# EAGLE board h-bridge_0.7 (EAGLE 8.0.0)
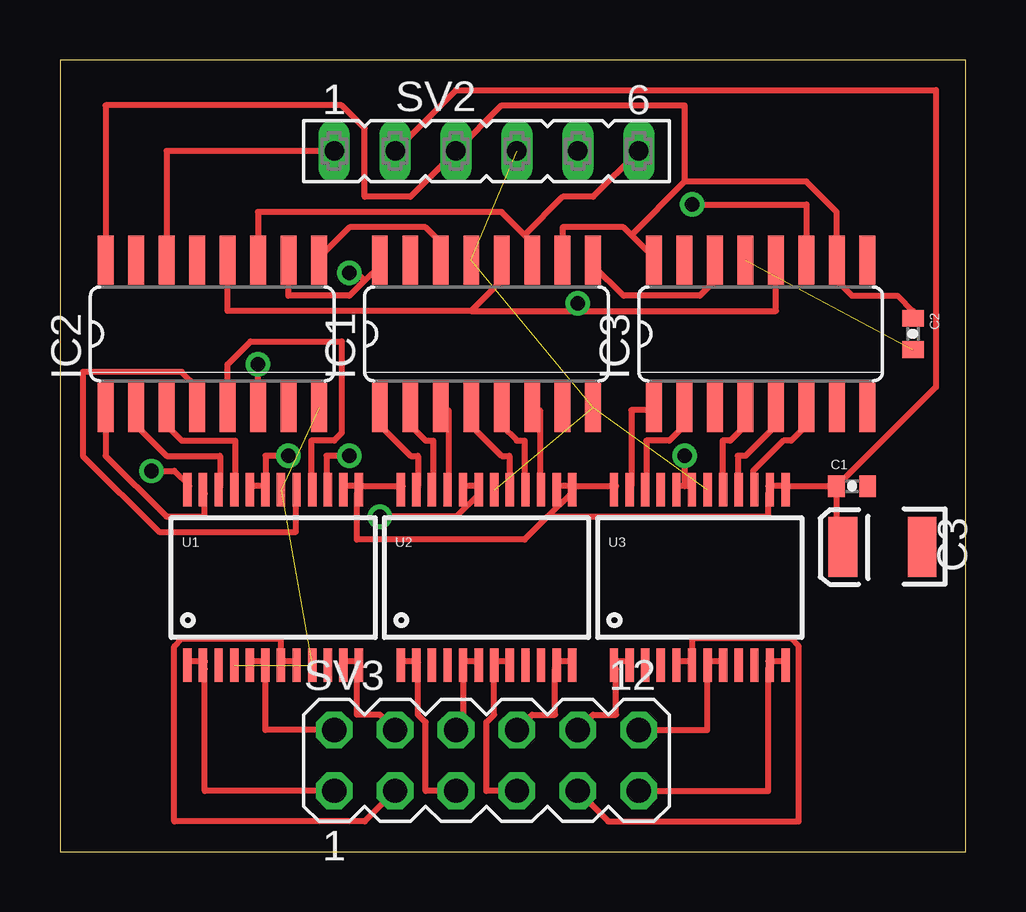
[diagram p0: board, top side]
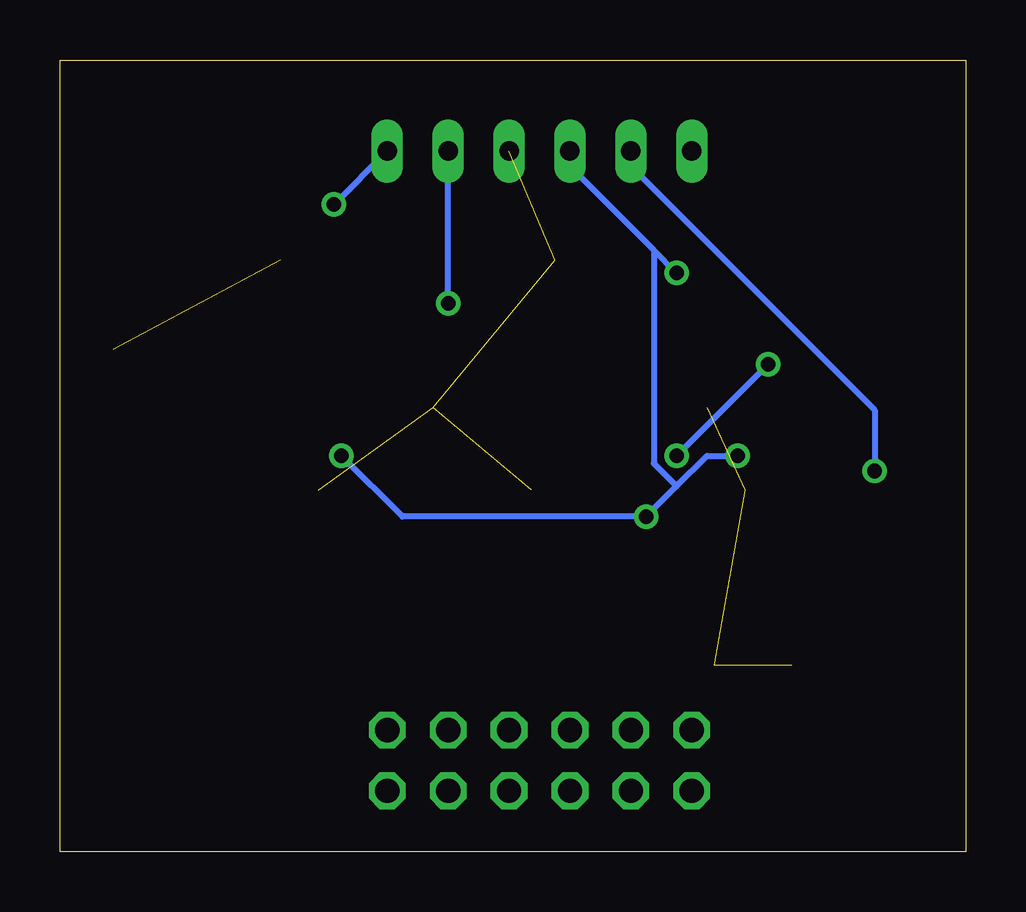
[diagram p1: board, bottom side, seen from below]

Size 37.77 x 33.01 mm. Coordinates in mm from the lower left corner, seen from the top.
Outline: 0,0 37.77,0 37.77,33.01 0,33.01 0,0
Copper layers (1*16): Top 0.035mm / dielectric 1.5mm / Bottom 0.035mm
Design rules "default": minimum track width 10mil, minimum drill 24mil, track to track 8mil, track to pad 8mil, pad to pad 8mil, via to via 8mil, smd to smd 8mil, copper to edge 40mil, drill to drill 8mil, minimum pad ring 10mil, minimum via ring 8mil, stop-mask expansion 4mil, vias tented up to drill 0mil, thermal gap 10mil

## Footprints (pad centres in the part's own frame; a part is rotated, then mirrored left to right if it is on the bottom)
0402-CAP = smd 0.7 x 0.9: 1 -0.65,0; 2 0.65,0
EIA3528 = smd 1.2 x 2.5: A 1.65,0; C -1.65,0
SO16 = smd 0.66 x 2.032: 1 -4.445,-3.073; 2 -3.175,-3.073; 3 -1.905,-3.073; 4 -0.635,-3.073; 5 0.635,-3.073; 6 1.905,-3.073; 7 3.175,-3.073; 8 4.445,-3.073; 9 4.445,3.073; 10 3.175,3.073; 11 1.905,3.073; 12 0.635,3.073; 13 -0.635,3.073; 14 -1.905,3.073; 15 -3.175,3.073; 16 -4.445,3.073
FE06 = drill 0.813 long: 1 -6.35,0; 2 -3.81,0; 3 -1.27,0; 4 1.27,0; 5 3.81,0; 6 6.35,0
MA06-2 = drill 1.016 octagon: 1 -6.35,-1.27; 2 -6.35,1.27; 3 -3.81,-1.27; 4 -3.81,1.27; 5 -1.27,-1.27; 6 -1.27,1.27; 7 1.27,-1.27; 8 1.27,1.27; 9 3.81,-1.27; 10 3.81,1.27; 11 6.35,-1.27; 12 6.35,1.27
SSOP24 = smd 0.348 x 1.397: 1 -3.575,-3.656; 2 -2.925,-3.656; 3 -2.275,-3.656; 4 -1.625,-3.656; 5 -0.975,-3.656; 6 -0.325,-3.656; 7 0.325,-3.656; 8 0.975,-3.656; 9 1.625,-3.656; 10 2.275,-3.656; 11 2.925,-3.656; 12 3.575,-3.656; 13 3.575,3.656; 14 2.925,3.656; 15 2.275,3.656; 16 1.625,3.656; 17 0.975,3.656; 18 0.325,3.656; 19 -0.325,3.656; 20 -0.975,3.656; 21 -1.625,3.656; 22 -2.275,3.656; 23 -2.925,3.656; 24 -3.575,3.656

## Placement (x,y rotation side)
C1  0.4uF  [0402-CAP]  33.02,15.24 0 top
C2  0.4uF  [0402-CAP]  35.56,21.59 270 top
C3  40uf , 20V  [EIA3528]  34.29,12.7 180 top
IC1  74HC595D  [SO16]  17.78,21.59 0 top
IC2  74HC595D  [SO16]  6.35,21.59 0 top
IC3  74HC595D  [SO16]  29.21,21.59 0 top
SV2  [FE06]  17.78,29.21 0 top
SV3  [MA06-2]  17.78,3.81 0 top
U1  TB6621FNG_0  [SSOP24]  8.89,11.43 0 top
U2  TB6621FNG_1  [SSOP24]  17.78,11.43 0 top
U3  TB6621FNG_2  [SSOP24]  26.67,11.43 0 top

## Library data of the parts
C1-C3 U1-U3 = SparkFun
IC1-IC3 = 74xx-eu
SV2 = con-lsta; OC_FARNELL: unknown; OC_NEWARK: unknown
SV3 = con-lstb; OC_FARNELL: unknown; OC_NEWARK: unknown

## Nets
+12V: C1.1 C3.A SV2.2 U1.13 U1.14 U1.24 U2.13 U2.14 U2.24 U3.13 U3.14 U3.24
A01: SV3.1 U1.1 U1.2
A02: SV3.2 U1.5 U1.6
B01: SV3.4 U1.11 U1.12
B02: SV3.3 U1.7 U1.8
C01: SV3.5 U2.1 U2.2
C02: SV3.6 U2.5 U2.6
D01: SV3.8 U2.11 U2.12
D02: SV3.7 U2.7 U2.8
E01: SV3.10 U3.1 U3.2
E02: SV3.9 U3.5 U3.6
F01: SV3.11 U3.11 U3.12
F02: SV3.12 U3.7 U3.8
GND: C1.2 C2.2 C3.C IC1.8 IC1.13 IC2.8 IC2.13 IC3.8 IC3.13 SV2.4 U1.3 U1.4 U1.9 U1.10 U1.18 U2.3 U2.4 U2.9 U2.10 U2.18 U3.3 U3.4 U3.9 U3.10 U3.18
N$1: IC2.5 U1.16
N$2: IC3.5 U3.16
N$3: IC2.2 U1.22
N$4: IC3.4 U3.17
N$5: IC2.6 U1.15
N$6: IC2.1 U1.23
N$7: IC1.11 IC2.11 IC3.11 SV2.6
N$8: IC2.14 SV2.1
N$9: IC1.12 IC2.12 IC3.12 SV2.5
N$10: IC1.14 IC2.9
N$11: IC2.4 U1.17
N$12: IC1.6 U2.15
N$13: IC2.3 U1.21
N$14: IC1.5 U2.16
N$15: IC1.4 U2.17
N$16: IC1.3 U2.21
N$17: IC1.2 U2.22
N$18: IC1.9 IC3.14
N$19: IC1.1 U2.23
N$20: IC3.3
N$21: IC3.6 U3.15
N$22: IC3.2 U3.22
N$23: U3.21
N$24: IC3.1 U3.23
VCC: C2.1 IC1.10 IC1.16 IC2.10 IC2.16 IC3.10 IC3.16 SV2.3 U1.19 U1.20 U2.19 U2.20 U3.19 U3.20

## Tracks (layer width: path | path; a pad name or v marks a point on that pad's centre or on a via)
+12V  (via drill 0.61)
  Top 0.254: 30.16,15.24 C1.1 32.38,15.24 | 30.16,15.24 29.53,15.24 U3.14 29.53,14.92 29.53,13.97 20.32,13.97 | 30.16,15.24 U3.13 | 32.38,15.24 32.38,12.7 C3.A | 12.38,15.24 11.75,15.24 U1.14 | 12.38,15.24 14.29,15.24 U2.24 | 12.38,15.24 U1.13 12.38,14.92 12.38,13.02 19.37,13.02 20.32,13.97 | 21.27,15.24 20.64,15.24 U2.14 | 21.27,15.24 23.18,15.24 U3.24 | 21.27,15.24 U2.13 21.27,14.92 20.32,13.97 | v3.81,15.88 4.76,15.88 5.4,15.24 U1.24 | 32.38,15.24 36.51,19.37 36.51,31.75 16.51,31.75 SV2.2
  Bottom 0.254: v3.81,15.88 3.81,18.41 13.97,28.57 SV2.2
A01
  Top 0.254: U1.1 5.4,7.94 6.03,7.94 U1.2 6.03,7.62 6.03,2.54 SV3.1
A02
  Top 0.254: U1.5 7.94,7.94 8.57,7.94 U1.6 8.57,7.62 8.57,5.08 SV3.2
B01
  Top 0.254: U1.11 11.75,7.94 12.38,7.94 U1.12 12.38,7.62 12.38,5.71 13.34,5.71 SV3.4
B02
  Top 0.254: 9.21,7.94 9.84,7.94 U1.8 | 9.21,7.94 9.21,8.89 5.08,8.89 4.76,8.57 4.76,1.27 12.7,1.27 SV3.3 | 9.21,7.94 U1.7
C01
  Top 0.254: U2.1 14.29,7.94 14.92,7.94 U2.2 14.92,7.62 14.92,5.71 15.24,5.4 15.24,2.54 SV3.5
C02
  Top 0.254: U2.6 17.46,7.94 16.83,7.94 U2.5 16.83,7.62 16.83,5.08 SV3.6
D01
  Top 0.254: U2.12 21.27,7.94 20.64,7.94 U2.11 20.64,7.62 20.64,5.71 19.68,5.71 SV3.8
D02
  Top 0.254: U2.8 18.73,7.94 18.1,7.94 U2.7 18.1,7.62 18.1,5.71 17.78,5.4 17.78,2.54 SV3.7
E01
  Top 0.254: U3.2 23.81,7.94 23.18,7.94 U3.1 23.18,7.62 23.18,5.71 22.23,5.71 SV3.10
E02
  Top 0.254: 26.35,7.94 25.72,7.94 U3.5 | 26.35,7.94 26.35,8.89 30.48,8.89 30.8,8.57 30.8,1.27 22.86,1.27 SV3.9 | 26.35,7.94 U3.6
F01
  Top 0.254: U3.12 30.16,7.94 29.53,7.94 U3.11 29.53,7.62 29.53,2.54 SV3.11
F02
  Top 0.254: U3.8 27.62,7.94 26.99,7.94 U3.7 26.99,7.62 26.99,5.08 SV3.12
GND  (8 unrouted)
N$1
  Top 0.254: IC2.5 6.99,20.32 7.94,21.27 11.75,21.27 11.75,17.46 11.43,17.14 10.48,17.14 10.48,15.24 U1.16
N$2
  Top 0.254: IC3.5 29.84,17.78 28.57,16.51 28.26,16.51 28.26,15.24 U3.16
N$3
  Top 0.254: IC2.2 3.18,17.78 4.45,16.51 6.67,16.51 6.67,15.24 U1.22
N$4
  Top 0.254: IC3.4 28.57,17.78 27.94,17.14 27.62,17.14 27.62,15.24 U3.17
N$5  (via drill 0.61)
  Top 0.254: v12.07,16.51 11.11,16.51 11.11,15.24 U1.15 | IC2.6 v8.26,20.32
  Bottom 0.254: v8.26,20.32 v12.07,16.51
N$6
  Top 0.254: IC2.1 1.9,16.51 4.45,13.97 6.03,13.97 6.03,14.92 U1.23
N$7  (via drill 0.61)
  Top 0.254: IC2.11 8.26,26.67 18.41,26.67 19.37,25.72 | 19.37,25.72 19.68,25.4 IC1.11 | IC3.11 31.11,26.99 v26.35,26.99 | 19.37,25.72 20.96,27.3 22.23,27.3 SV2.6
  Bottom 0.254: SV2.6 v26.35,26.99
N$8
  Top 0.254: IC2.14 4.45,29.21 SV2.1
N$9  (via drill 0.61)
  Top 0.254: IC2.12 6.99,22.54 17.14,22.54 | 17.14,22.54 18.41,23.81 IC1.12 | IC3.12 29.84,22.54 21.59,22.54 | 17.14,22.54 21.59,22.54 | 21.59,22.54 v21.59,22.86
  Bottom 0.254: v21.59,22.86 SV2.5
N$10
  Top 0.254: IC1.14 15.88,25.4 15.24,26.04 12.07,26.04 10.79,24.77 IC2.9
N$11
  Top 0.254: IC2.4 5.71,19.37 5.08,20 0.95,20 0.95,16.51 4.13,13.34 9.84,13.34 9.84,14.92 U1.17
N$12
  Top 0.254: U2.15 20,15.24 20,18.41 19.68,18.41 IC1.6
N$13
  Top 0.254: IC2.3 4.45,17.78 5.08,17.14 7.3,17.14 7.3,15.24 U1.21
N$14
  Top 0.254: IC1.5 18.41,17.78 19.05,17.14 19.37,17.14 19.37,15.24 U2.16
N$15
  Top 0.254: IC1.4 17.14,17.78 18.41,16.51 18.73,16.51 18.73,15.24 U2.17
N$16
  Top 0.254: U2.21 16.19,15.24 16.19,18.41 15.88,18.41 IC1.3
N$17
  Top 0.254: IC1.2 14.61,17.78 15.24,17.14 15.56,17.14 15.56,15.24 U2.22
N$18
  Top 0.254: IC3.14 27.3,23.81 26.67,23.18 23.5,23.18 22.23,24.45 IC1.9
N$19
  Top 0.254: IC1.1 13.34,17.78 14.61,16.51 14.92,16.51 14.92,15.24 U2.23
N$21
  Top 0.254: IC3.6 31.11,17.78 30.48,17.14 30.16,17.14 28.89,15.88 28.89,15.24 U3.15
N$22
  Top 0.254: IC3.2 26.04,17.78 25.4,17.14 24.45,17.14 24.45,15.24 U3.22
N$24
  Top 0.254: U3.23 23.81,15.24 23.81,18.41 24.77,18.41 IC3.1
VCC  (via drill 0.61)
  Top 0.254: 26.04,15.24 26.35,15.24 U3.19 | 26.04,15.24 25.72,15.24 U3.20 | 8.57,15.24 7.94,15.24 U1.20 | U2.20 16.83,15.24 17.46,15.24 U2.19 17.46,14.92 16.51,13.97 v13.34,13.97 | 8.57,15.24 8.57,16.51 v9.53,16.51 | 8.57,15.24 U1.19 | v26.04,16.51 26.04,15.24 | IC1.10 20.96,26.04 23.5,26.04 23.81,25.72 | 23.81,25.72 24.77,24.77 IC3.16 | C2.1 35.56,22.54 34.92,23.18 33.02,23.18 32.38,23.81 IC3.10 32.38,26.67 31.11,27.94 26.04,27.94 | 26.04,27.94 23.81,25.72 | IC2.10 9.53,23.18 12.07,23.18 12.7,23.81 | 12.7,23.81 13.34,24.45 IC1.16 | IC2.16 1.9,31.11 11.75,31.11 12.7,30.16 12.7,27.3 14.61,27.3 SV2.3 18.41,31.11 26.04,31.11 26.04,27.94 | 12.7,23.81 12.38,24.13 v12.07,24.13
  Bottom 0.254: v9.53,16.51 10.79,16.51 12.07,15.24 | 12.07,15.24 v13.34,13.97 23.5,13.97 v26.04,16.51 | 13.02,25.08 16.51,28.57 SV2.3 | 13.02,25.08 v12.07,24.13 | 12.07,15.24 13.02,16.19 13.02,25.08